# Altium PCB amc3302-v1.02.PcbDoc (part 1 of 2)
Units mm, origin at the board's own origin, x right, y up, seen from the top; angles counter-clockwise.
Board outline 100 x 75 mm, 4 copper layers (Top Layer, GND, VCC, Bottom Layer), stack 1.592 mm thick; 98 components, 51 nets, 268 pads, 520 vias.
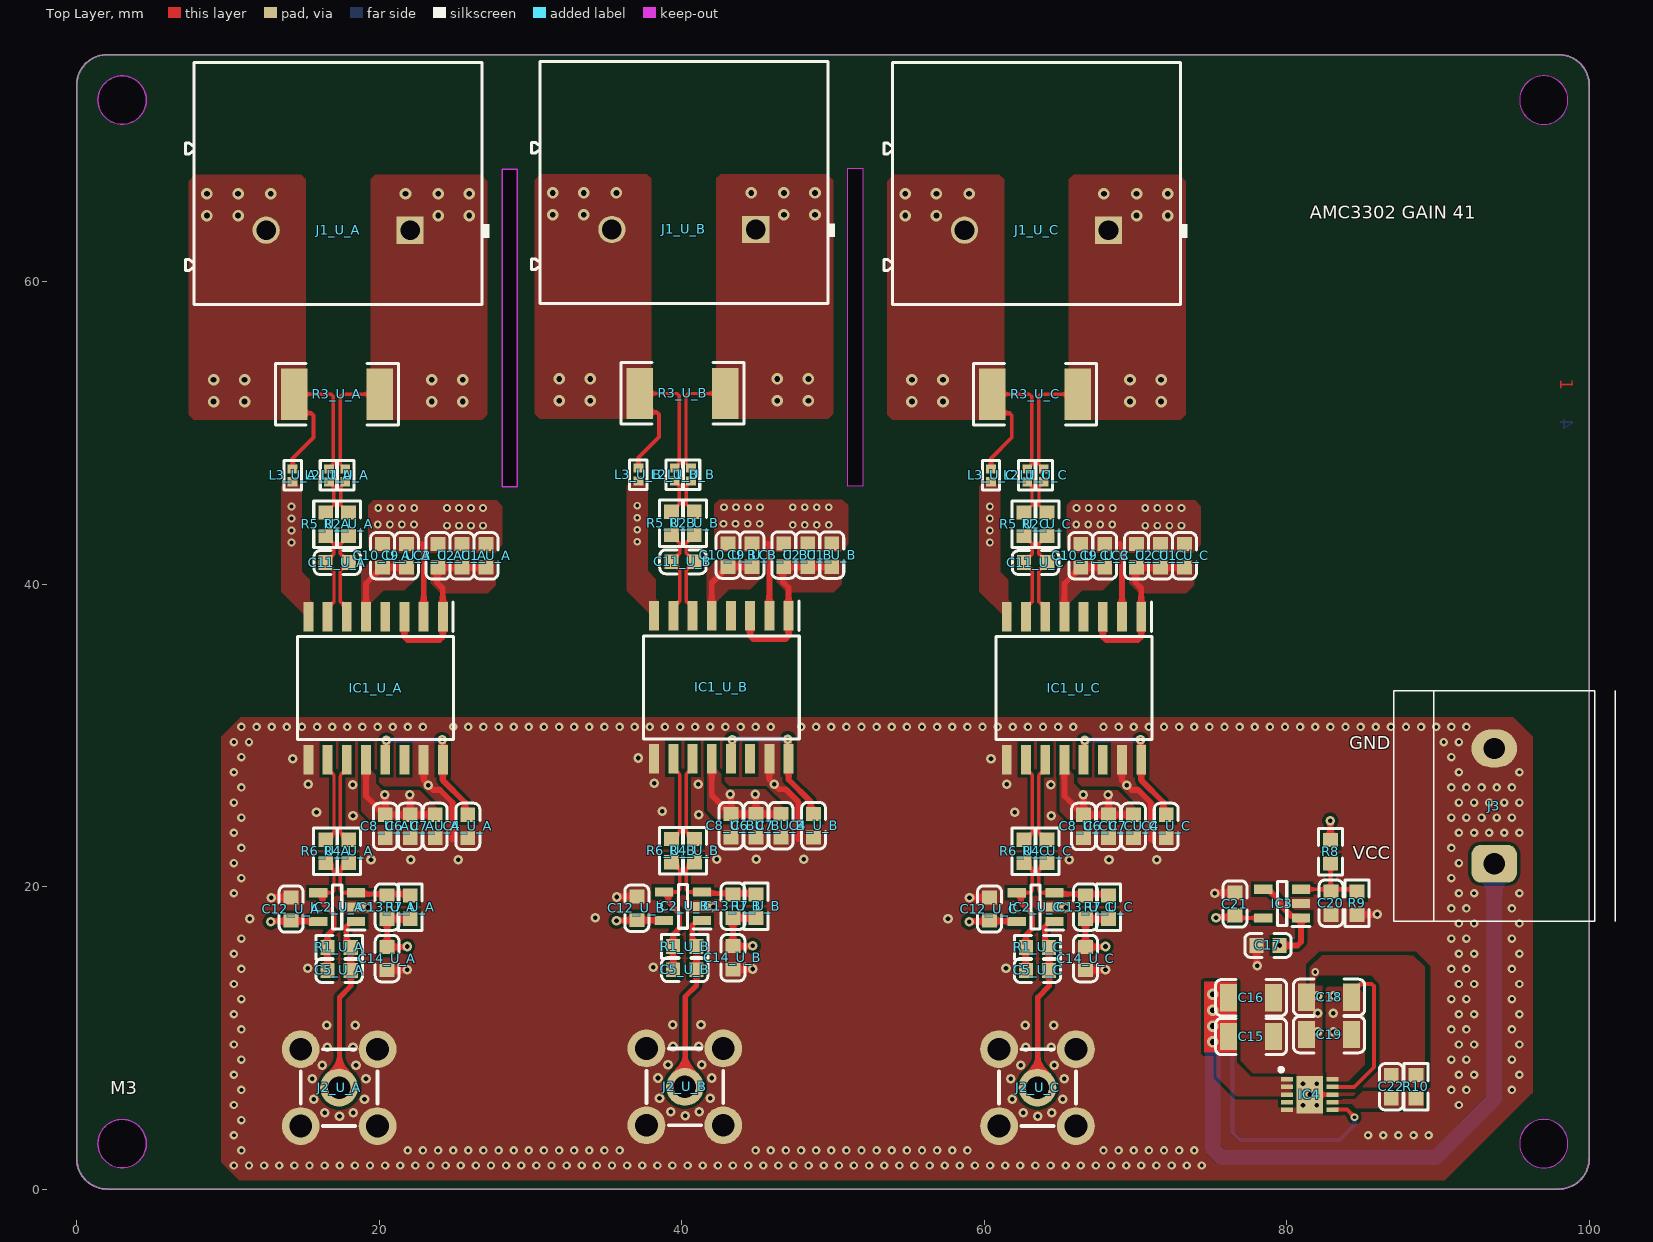
[diagram p0: Top Layer view]
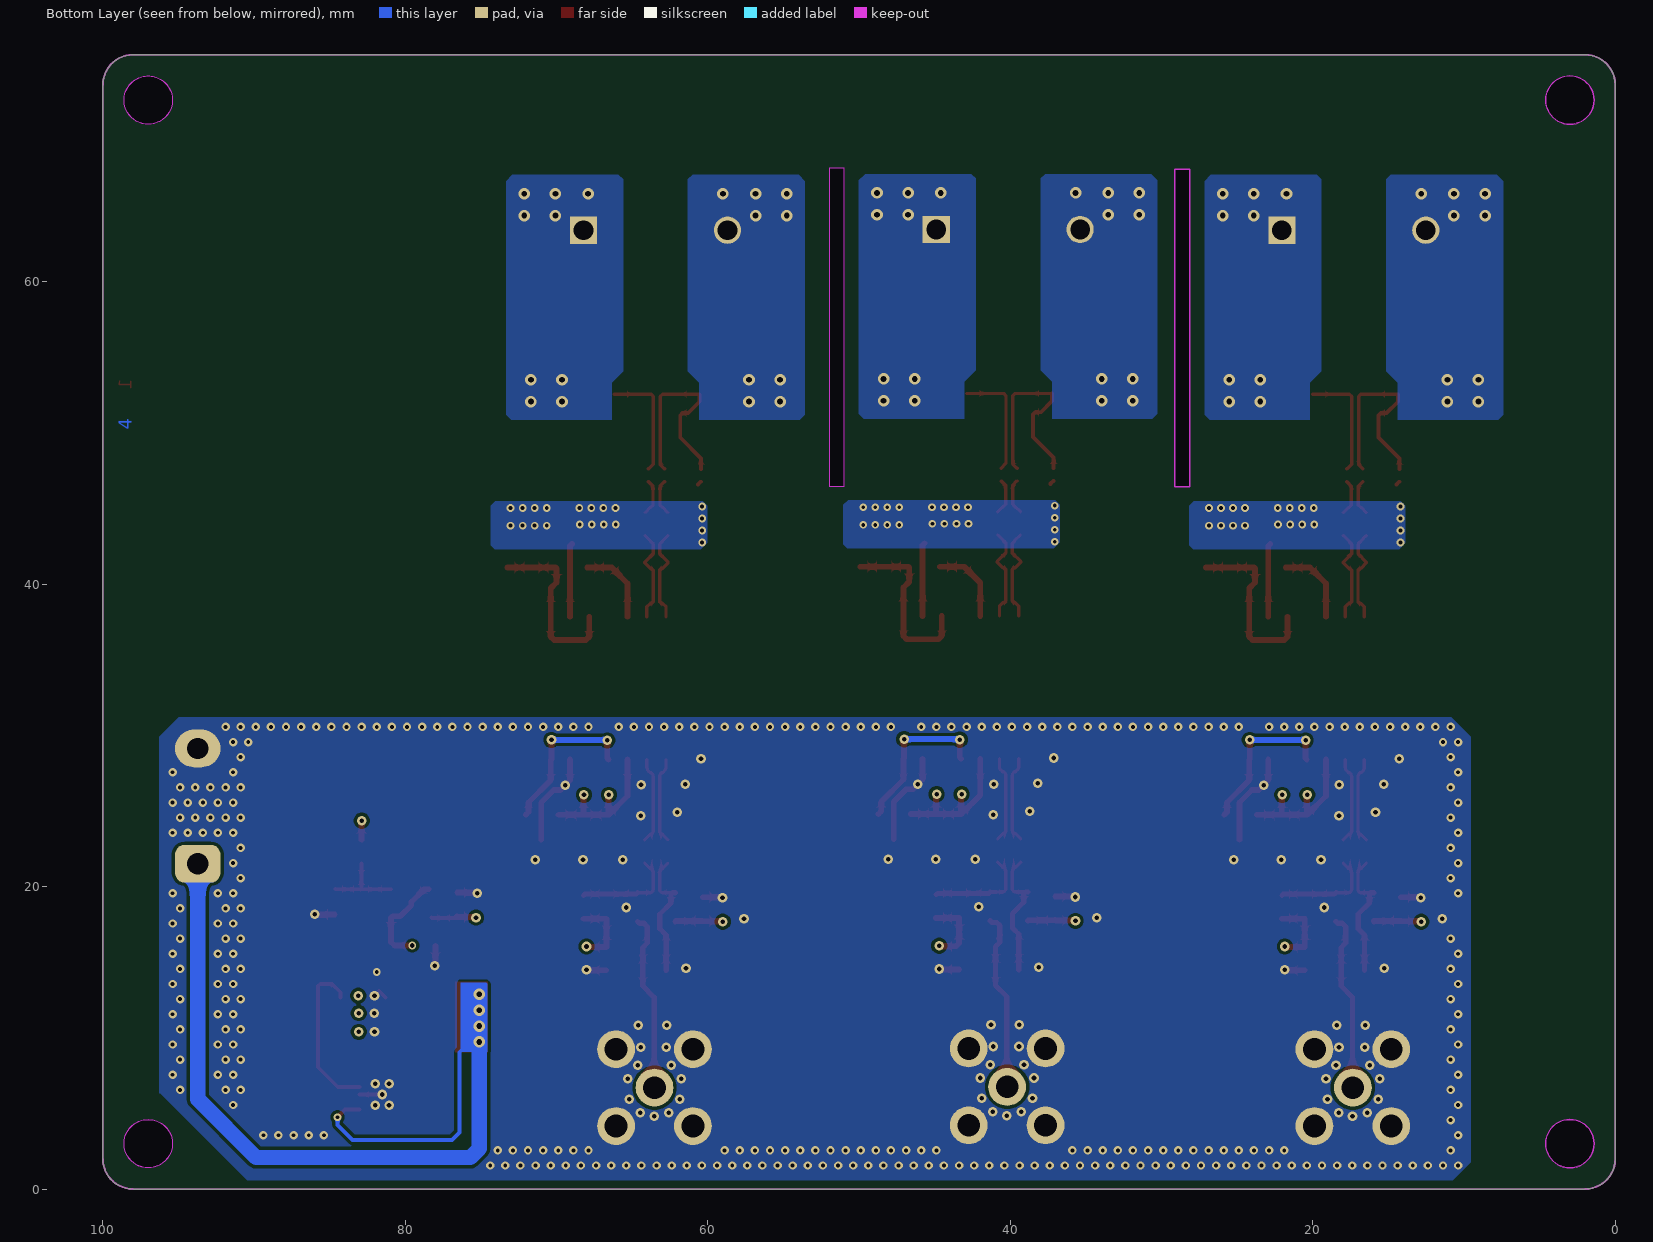
[diagram p1: Bottom Layer view, seen from below]
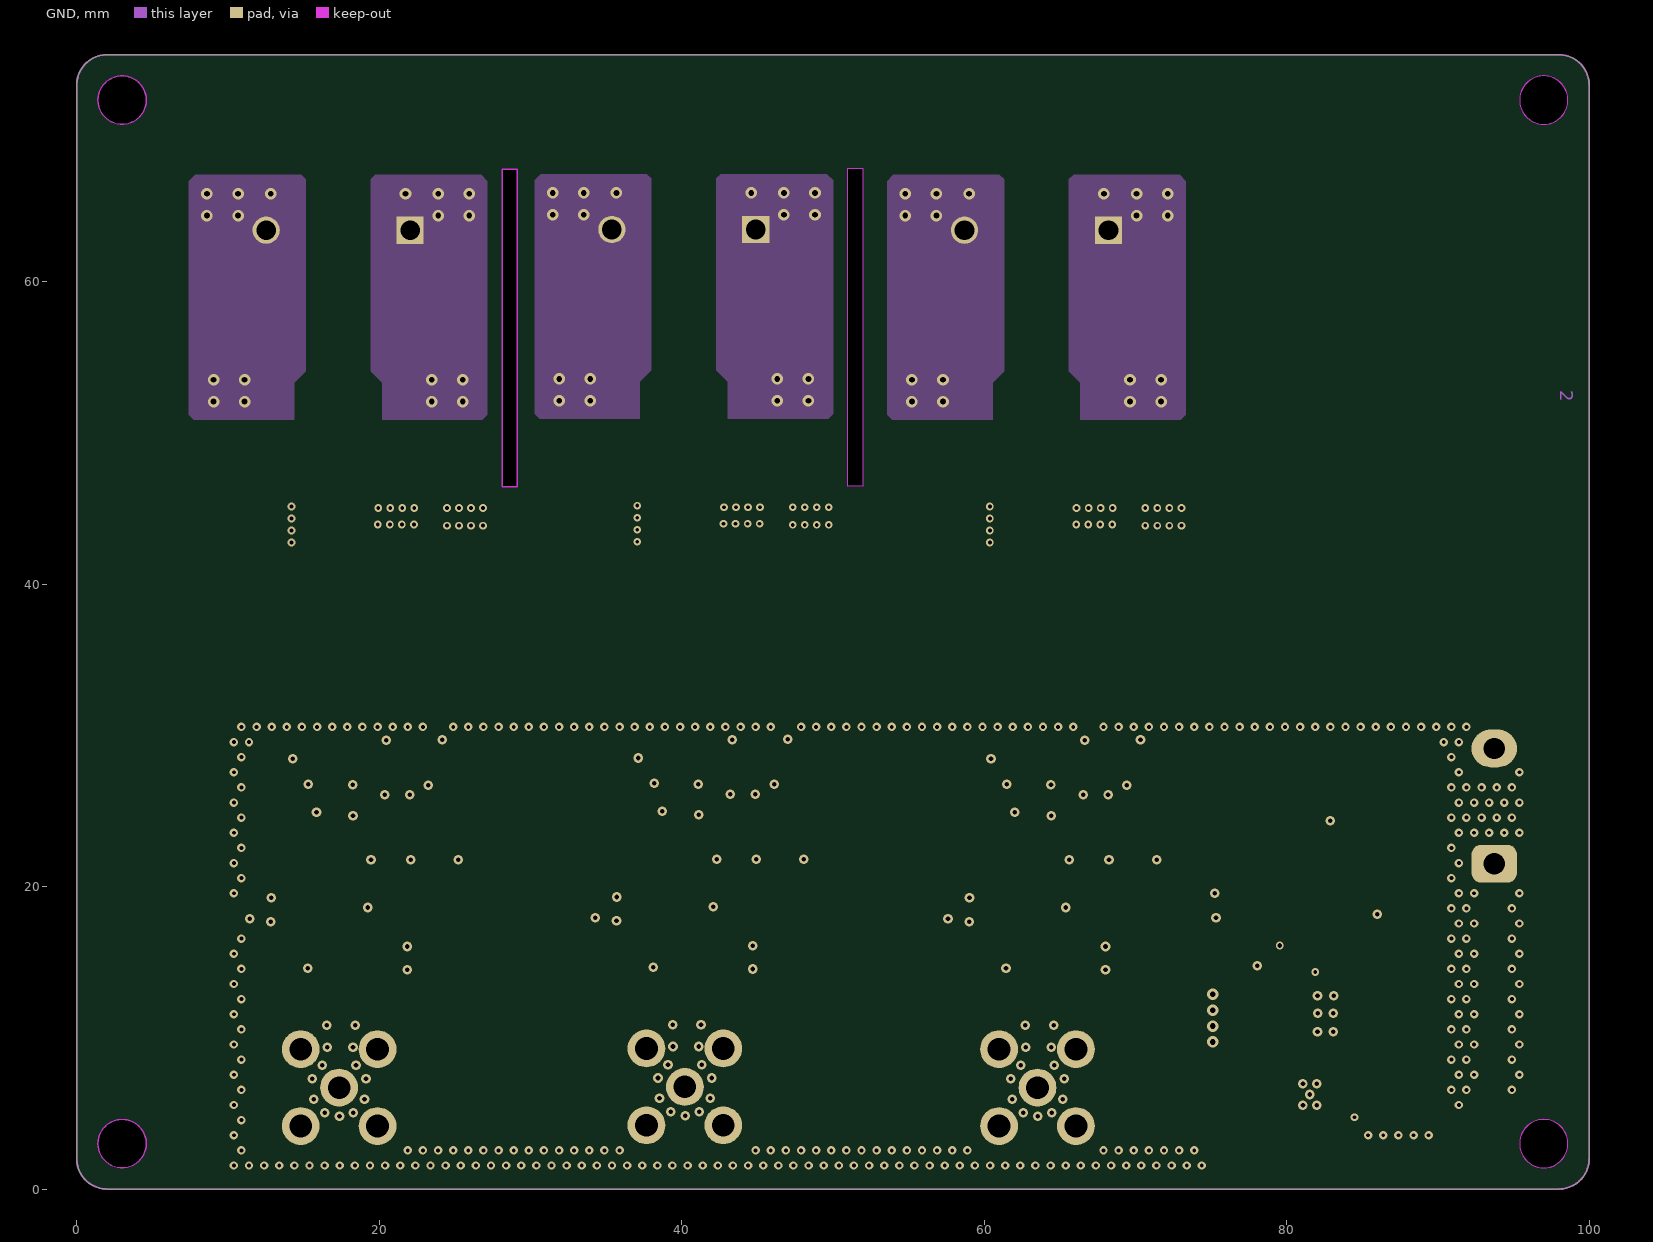
[diagram p2: GND]
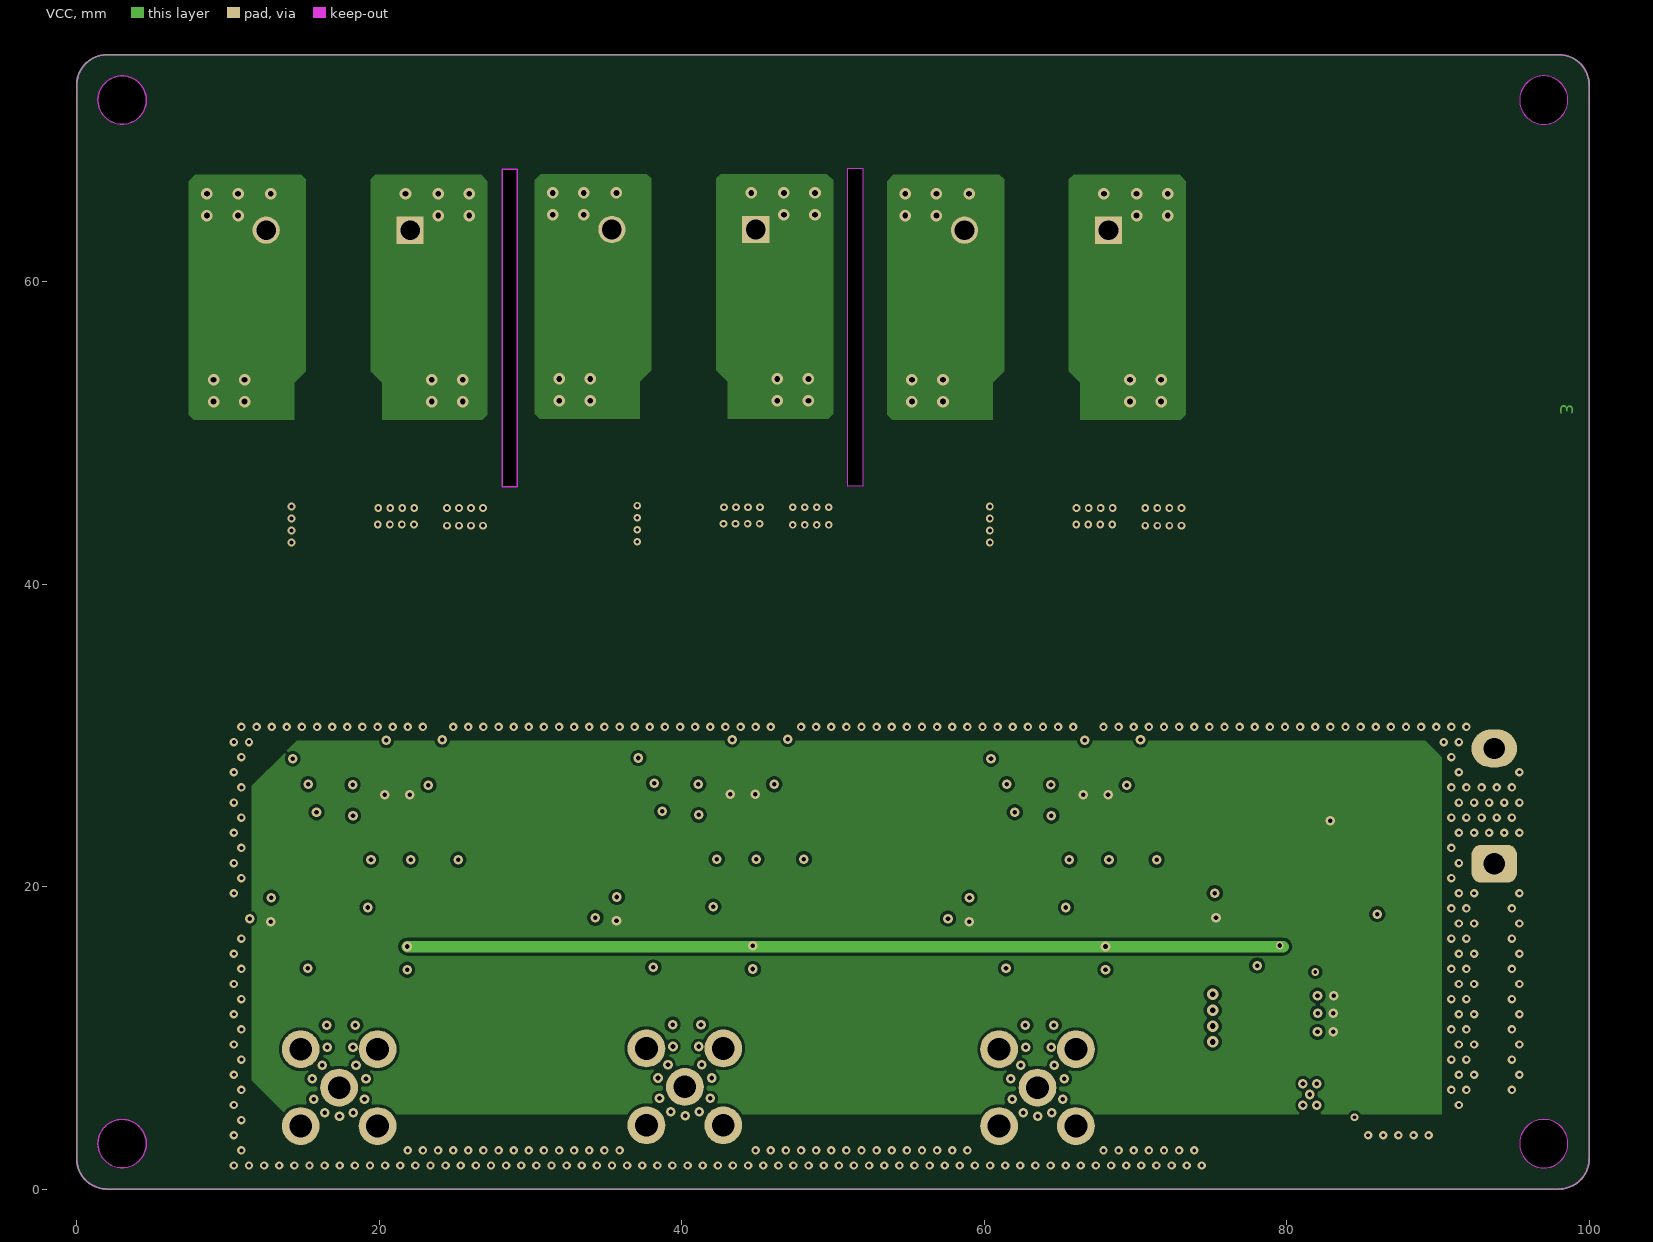
[diagram p3: VCC]
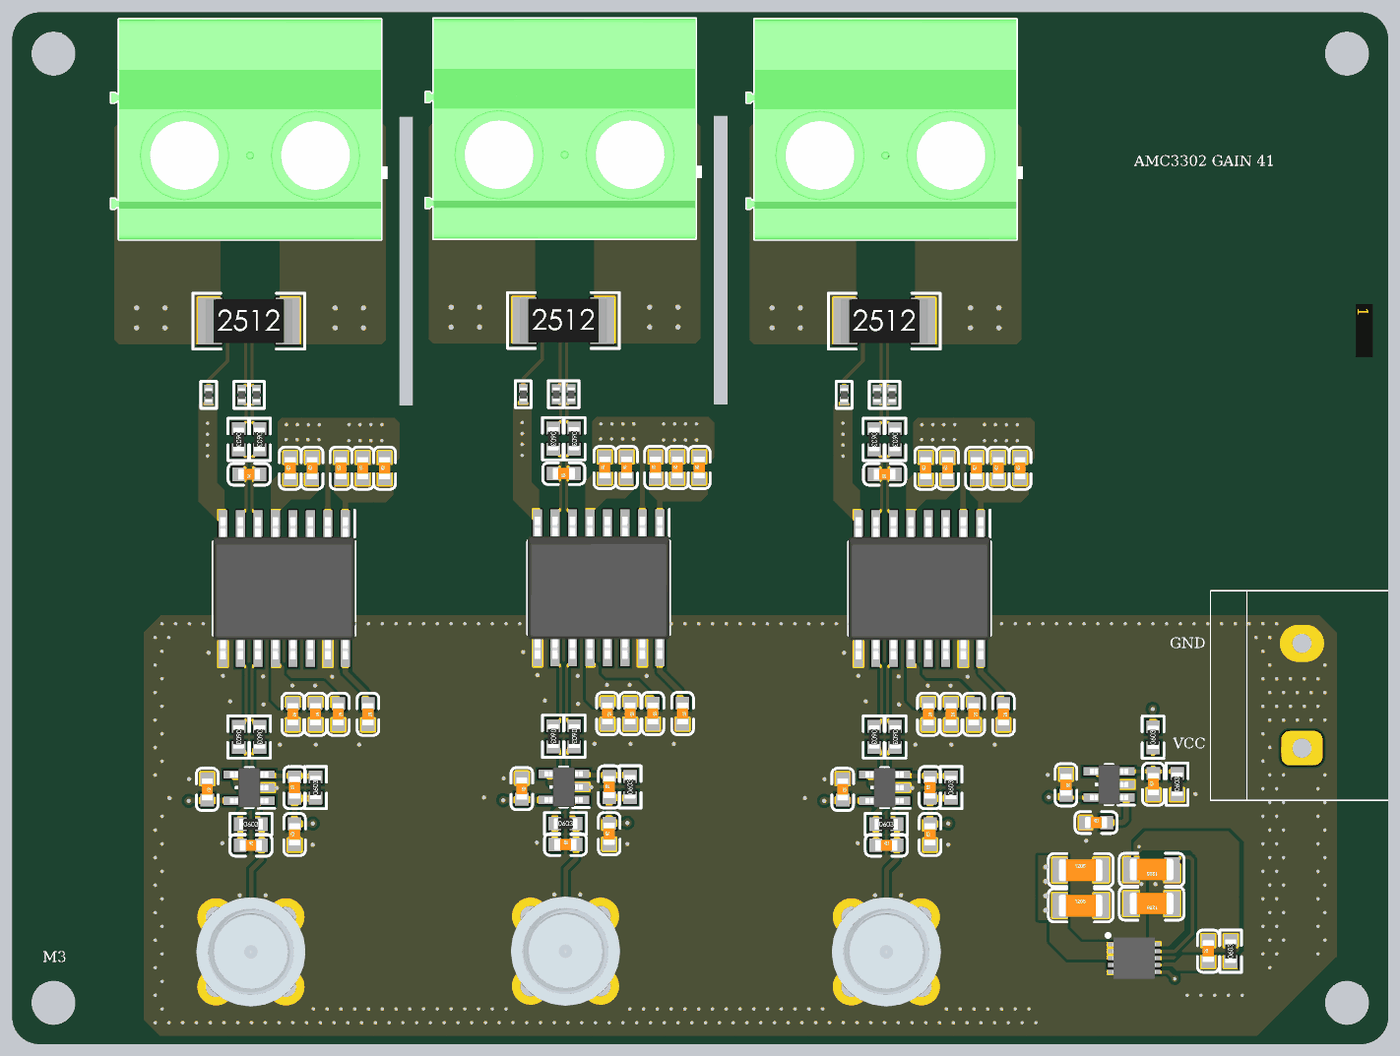
[diagram p5: 3D render of the assembled board from above, using the file's embedded part models]

## Layer stack, top to bottom
Top Solder: solder mask 0.0102, Solder Resist, Dk 3.5
Top Layer: signal copper 0.0356
Dielectric 2: prepreg 0.2103, PP-006, Dk 4.1
GND: signal copper 0.0175
Dielectric 1: dielectric 1.065, FR-4, Dk 4.8
VCC: signal copper 0.0175
Dielectric 3: prepreg 0.2103, PP-006, Dk 4.1
Bottom Layer: signal copper 0.0356
Bottom Solder: solder mask 0.0102, Solder Resist, Dk 3.5

## Board outline
0,2 0,73 cw(c2,73) 2,75 98,75 cw(c98,73) 100,73 100,2 cw(c98,2) 98,0 2,0 cw(c2,2)
cut-out: 95.4,72 ccw(c97,72) 97,70.4 ccw(c97,72) 98.6,72 ccw(c97,72) 97,73.6 ccw(c97,72)
cut-out: 95.4,3 ccw(c97,3) 97,1.4 ccw(c97,3) 98.6,3 ccw(c97,3) 97,4.6 ccw(c97,3)
cut-out: 3,70.4 cw(c3,72) 1.4,72 cw(c3,72) 3,73.6 cw(c3,72) 4.6,72 cw(c3,72)
cut-out: 3,1.4 cw(c3,3) 1.4,3 cw(c3,3) 3,4.6 cw(c3,3) 4.6,3 cw(c3,3)
cut-out: 50.978,46.482 50.978,67.488 51.978,67.488 51.978,46.482
cut-out: 28.118,46.431 28.118,67.437 29.118,67.437 29.118,46.431

## Design rules (kind name [scope] priority, off if disabled: settings)
Clearance [All] p1: gap=0.203 ignorepadtopadclearanceinfootprint=TRUE
DiffPairsRouting [All] p1: maxlimit=0.254 minlimit=0.203 mostfreqgap=0.203 toplayer_minwidth=0.152 toplayer_maxwidth=0.381 toplayer_prefwidth=0.22 midlayer1_minwidth=0.152 midlayer1_maxwidth=0.381 midlayer1_prefwidth=0.22 midlayer2_minwidth=0.152 midlayer2_maxwidth=0.381 midlayer2_prefwidth=0.22 bottomlayer_minwidth=0.152 bottomlayer_maxwidth=0.381 bottomlayer_prefwidth=0.22 maxuncoupledlength=12.7
HoleToHoleClearance [All] p1: gap=0 allowstackedmicrovias=TRUE
MinimumSolderMaskSliver [All] p1: minsoldermaskwidth=0
PlaneConnect [All] p1: planeconnectstyle=Direct reliefexpansion=0.508 reliefentries=4 reliefconductorwidth=0.254 reliefairgap=0.254
PolygonConnect [All] p1: connectstyle=Direct reliefconductorwidth=0.254 reliefentries=4 polygonreliefangle="90 Angle" airgapwidth=0.254
RoutingVias [All] p1: holewidth=0.356 width=0.711 viastyle="Through Hole" minholewidth=0.152 minwidth=0.508 maxholewidth=1.27 maxwidth=1.27
SilkToSilkClearance [All] p1: silktosilkclearance=0
SilkToSolderMaskClearance [IsPad] p1: minsilkscreentomaskgap=0 clearancetoexposedcopper=TRUE
SolderMaskExpansion [All] p1: expansion=0.102 istentingtop=FALSE
SupplyNets "Schematic Supply Nets_5" [InNet('Vref')] p1: voltage=0.000
SupplyNets "Schematic Supply Nets_3" [InNet('+3V3')] p2: voltage=0.000
SupplyNets "Schematic Supply Nets_1" [InNet('GND')] p3: voltage=0.000
SupplyNets "Schematic Supply Nets" [InNet('Vin')] p4: voltage=0.000
Width [All] p1: maxlimit=1.27 minlimit=0.254 preferedwidth=0.349
24 further rules are at their usual default settings.

## Classes and differential pairs
channel class Sheet2: U_A U_B U_C
component class U_C: C1_U_C C2_U_C C3_U_C C4_U_C C5_U_C C6_U_C C7_U_C C8_U_C C9_U_C C10_U_C C11_U_C C12_U_C C13_U_C C14_U_C IC1_U_C IC2_U_C J1_U_C J2_U_C L1_U_C L2_U_C L3_U_C R1_U_C R2_U_C R3_U_C R4_U_C R5_U_C R6_U_C R7_U_C
component class U_B: C1_U_B C2_U_B C3_U_B C4_U_B C5_U_B C6_U_B C7_U_B C8_U_B C9_U_B C10_U_B C11_U_B C12_U_B C13_U_B C14_U_B IC1_U_B IC2_U_B J1_U_B J2_U_B L1_U_B L2_U_B L3_U_B R1_U_B R2_U_B R3_U_B R4_U_B R5_U_B R6_U_B R7_U_B
component class U_A: C1_U_A C2_U_A C3_U_A C4_U_A C5_U_A C6_U_A C7_U_A C8_U_A C9_U_A C10_U_A C11_U_A C12_U_A C13_U_A C14_U_A IC1_U_A IC2_U_A J1_U_A J2_U_A L1_U_A L2_U_A L3_U_A R1_U_A R2_U_A R3_U_A R4_U_A R5_U_A R6_U_A R7_U_A
component class Sheet3: C15 C16 C18 C22 IC3 IC4 J3 R8 R9 R10
differential pair op_U_C: +op_U_C_P -op_U_C_N
differential pair op_U_B: +op_U_B_P -op_U_B_N
differential pair op_U_A: +op_U_A_P -op_U_A_N
differential pair _U_C: +_U_C_P -_U_C_N
differential pair _U_B: +_U_B_P -_U_B_N
differential pair _U_A: +_U_A_P -_U_A_N
differential pair Out_U_C: +Out_U_C_P -Out_U_C_N
differential pair Out_U_B: +Out_U_B_P -Out_U_B_N
differential pair Out_U_A: +Out_U_A_P -Out_U_A_N
differential pair In_U_C: +In_U_C_P -In_U_C_N
differential pair In_U_B: +In_U_B_P -In_U_B_N
differential pair In_U_A: +In_U_A_P -In_U_A_N
differential pair In_ic_U_C: +In_ic_U_C_P -In_ic_U_C_N
differential pair In_ic_U_B: +In_ic_U_B_P -In_ic_U_B_N
differential pair In_ic_U_A: +In_ic_U_A_P -In_ic_U_A_N

## Components (designator, comment, footprint, x,y, rotation, side; value= is the part's Value field where it differs from the comment)
C1_U_A "1nF" C-0603 27.063,41.867 r90 top (schematic designator C1)
C1_U_B "1nF" C-0603 49.923,41.918 r90 top (schematic designator C1)
C1_U_C "1nF" C-0603 73.241,41.867 r90 top (schematic designator C1)
C2_U_A "0.1uF" C-0603 25.476,41.867 r90 top (schematic designator C2)
C2_U_B "0.1uF" C-0603 48.336,41.918 r90 top (schematic designator C2)
C2_U_C "0.1uF" C-0603 71.653,41.867 r90 top (schematic designator C2)
C3_U_A "1uF" C-0603 23.889,41.867 r90 top (schematic designator C3)
C3_U_B "1uF" C-0603 46.749,41.918 r90 top (schematic designator C3)
C3_U_C "1uF" C-0603 70.066,41.867 r90 top (schematic designator C3)
C4_U_A "0.1uF" C-0603 25.857,23.978 r270 top (schematic designator C4)
C4_U_B "0.1uF" C-0603 48.717,24.028 r270 top (schematic designator C4)
C4_U_C "0.1uF" C-0603 72.034,23.978 r270 top (schematic designator C4)
C5_U_A "330pF" C-0603 17.348,14.453 r0 top (schematic designator C5)
C5_U_B "330pF" C-0603 40.208,14.503 r0 top (schematic designator C5)
C5_U_C "330pF" C-0603 63.525,14.453 r0 top (schematic designator C5)
C6_U_A "1nF" C-0603 22.047,23.978 r270 top (schematic designator C6)
C6_U_B "1nF" C-0603 44.907,24.028 r270 top (schematic designator C6)
C6_U_C "1nF" C-0603 68.224,23.978 r270 top (schematic designator C6)
C7_U_A "1uF" C-0603 23.698,23.978 r270 top (schematic designator C7)
C7_U_B "1uF" C-0603 46.558,24.028 r270 top (schematic designator C7)
C7_U_C "1uF" C-0603 69.875,23.978 r270 top (schematic designator C7)
C8_U_A "10uF" C-0603 20.396,23.978 r270 top (schematic designator C8)
C8_U_B "10uF" C-0603 43.256,24.028 r270 top (schematic designator C8)
C8_U_C "10uF" C-0603 66.573,23.978 r270 top (schematic designator C8)
C9_U_A "0.1uF" C-0603 21.794,41.867 r90 top (schematic designator C9)
C9_U_B "0.1uF" C-0603 44.654,41.918 r90 top (schematic designator C9)
C9_U_C "0.1uF" C-0603 67.971,41.867 r90 top (schematic designator C9)
C10_U_A "1nF" C-0603 20.206,41.867 r90 top (schematic designator C10)
C10_U_B "1nF" C-0603 43.066,41.918 r90 top (schematic designator C10)
C10_U_C "1nF" C-0603 66.384,41.867 r90 top (schematic designator C10)
C11_U_A "10nF" C-0603 17.221,41.421 r180 top (schematic designator C11)
C11_U_B "10nF" C-0603 40.081,41.471 r180 top (schematic designator C11)
C11_U_C "10nF" C-0603 63.398,41.421 r180 top (schematic designator C11)
C12_U_A "0.1uF" C-0603 14.173,18.517 r270 top (schematic designator C12)
C12_U_B "0.1uF" C-0603 37.033,18.567 r270 top (schematic designator C12)
C12_U_C "0.1uF" C-0603 60.35,18.517 r270 top (schematic designator C12)
C13_U_A "330pF" C-0603 20.523,18.644 r90 top (schematic designator C13)
C13_U_B "330pF" C-0603 43.383,18.694 r90 top (schematic designator C13)
C13_U_C "330pF" C-0603 66.7,18.644 r90 top (schematic designator C13)
C14_U_A "0.1uF" C-0603 20.523,15.24 r90 top (schematic designator C14)
C14_U_B "0.1uF" C-0603 43.383,15.291 r90 top (schematic designator C14)
C14_U_C "0.1uF" C-0603 66.7,15.24 r90 top (schematic designator C14)
C15 "10uF 50V" C-1206 77.648,10.084 r0 top
C16 "2.2uF 50V" C-1206 77.648,12.649 r0 top
C17 "0.1uF" C-0603 78.765,16.104 r0 top
C18 "10uF 50V" C-1206 82.804,12.675 r180 top
C19 "10uF 50V" C-1206 82.804,10.211 r180 top
C20 "0.1uF" C-0603 82.931,18.898 r90 top
C21 "0.1uF" C-0603 76.581,18.847 r270 top
C22 "4.7uF 50V" C-0603 86.919,6.756 r90 top
IC1_U_A "AMC3302DWE" SOIC127P1030X265-16N 19.761,33.122 r270 top (schematic designator IC1)
IC1_U_B "AMC3302DWE" SOIC127P1030X265-16N 42.621,33.172 r270 top (schematic designator IC1)
IC1_U_C "AMC3302DWE" SOIC127P1030X265-16N 65.938,33.122 r270 top (schematic designator IC1)
IC2_U_A "opa991qbvrq1" SOT95P280X145-5N 17.221,18.644 r180 top (schematic designator IC2)
IC2_U_B "opa991qbvrq1" SOT95P280X145-5N 40.081,18.694 r180 top (schematic designator IC2)
IC2_U_C "opa991qbvrq1" SOT95P280X145-5N 63.398,18.644 r180 top (schematic designator IC2)
IC3 "opa991qbvrq1" SOT95P280X145-5N 79.705,18.872 r180 top
IC4 "LT3045EDD#PBF" SON50P300X300X80-11N-D 81.534,6.248 r0 top
J1_U_A "J-2PIN" 2pin 16.84,63.398 r0 top (schematic designator J1)
J1_U_B "J-2PIN" 2pin 39.7,63.449 r0 top (schematic designator J1)
J1_U_C "J-2PIN" 2pin 63.017,63.398 r0 top (schematic designator J1)
J2_U_A "J-2PIN" "SMA RF同轴链接器" 17.348,6.706 r0 top (schematic designator J2)
J2_U_B "J-2PIN" "SMA RF同轴链接器" 40.208,6.756 r0 top (schematic designator J2)
J2_U_C "J-2PIN" "SMA RF同轴链接器" 63.525,6.706 r0 top (schematic designator J2)
J3 "J-2PIN" "CON  7.62mm 2x1P" 93.726,25.324 r90 top
L1_U_A "FB" L-0402 17.758,47.193 r270 top (schematic designator L1)
L1_U_B "FB" L-0402 40.618,47.244 r270 top (schematic designator L1)
L1_U_C "FB" L-0402 63.935,47.193 r270 top (schematic designator L1)
L2_U_A "FB" L-0402 16.675,47.193 r270 top (schematic designator L2)
L2_U_B "FB" L-0402 39.535,47.244 r270 top (schematic designator L2)
L2_U_C "FB" L-0402 62.853,47.193 r270 top (schematic designator L2)
L3_U_A "FB" L-0402 14.275,47.193 r270 top (schematic designator L3)
L3_U_B "FB" L-0402 37.135,47.244 r270 top (schematic designator L3)
L3_U_C "FB" L-0402 60.452,47.193 r270 top (schematic designator L3)
R1_U_A "3.3k" R-0603 17.348,15.977 r0 top (schematic designator R1)
R1_U_B "3.3k" R-0603 40.208,16.027 r0 top (schematic designator R1)
R1_U_C "3.3k" R-0603 63.525,15.977 r0 top (schematic designator R1)
R2_U_A "10R" R-0603 17.973,43.961 r270 top (schematic designator R2)
R2_U_B "10R" R-0603 40.833,44.011 r270 top (schematic designator R2)
R2_U_C "10R" R-0603 64.151,43.961 r270 top (schematic designator R2)
R3_U_A "R" R-2512 17.196,52.554 r0 top (schematic designator R3)
R3_U_B "R" R-2512 40.056,52.605 r0 top (schematic designator R3)
R3_U_C "R" R-2512 63.373,52.554 r0 top (schematic designator R3)
R4_U_A "3.3k" R-0603 17.983,22.327 r270 top (schematic designator R4)
R4_U_B "3.3k" R-0603 40.843,22.377 r270 top (schematic designator R4)
R4_U_C "3.3k" R-0603 64.16,22.327 r270 top (schematic designator R4)
R5_U_A "10R" R-0603 16.46,43.961 r270 top (schematic designator R5)
R5_U_B "10R" R-0603 39.32,44.011 r270 top (schematic designator R5)
R5_U_C "10R" R-0603 62.637,43.961 r270 top (schematic designator R5)
R6_U_A "3.3k" R-0603 16.459,22.327 r270 top (schematic designator R6)
R6_U_B "3.3k" R-0603 39.319,22.377 r270 top (schematic designator R6)
R6_U_C "3.3k" R-0603 62.636,22.327 r270 top (schematic designator R6)
R7_U_A "3.3k" R-0603 22.047,18.644 r90 top (schematic designator R7)
R7_U_B "3.3k" R-0603 44.907,18.694 r90 top (schematic designator R7)
R7_U_C "3.3k" R-0603 68.224,18.644 r90 top (schematic designator R7)
R8 "3.3k" R-0603 82.906,22.301 r90 top
R9 "3.3k" R-0603 84.658,18.898 r90 top
R10 "33.2K" R-0603 88.544,6.756 r90 top

## Footprints (in the part's own frame and the unit in brackets; to place one, negate y for a bottom-side part, rotate by r counter-clockwise, add the part's x,y. Pads: shape width x height; smd on the part's side, far side on the other; paste and mask are expansions set on the pad)
2pin [mm]
  rect 1.8x1.8 hole 1.3: 1(5.202,0)
  round 1.8 hole 1.3: 2(-4.318,0)
  silkscreen extent -9.65,-4.9 10.44,11.1, body extent -9.65,-4.9 9.96,11.1, height 22
C-0603 [mm]
  rect 0.93x0.98 smd: 1(-0.77,0) 2(0.77,0)
  silkscreen extent -1.53,-0.79 1.54,0.79, body extent -0.8,-0.4 0.8,0.4, height 0.3
C-1206 [mm]
  rect 1.13x1.8 smd: 1(-1.49,0) 2(1.49,0)
  silkscreen extent -2.36,-1.2 2.35,1.2, body extent -1.6,-0.81 1.6,0.79, height 1
"CON  7.62mm 2x1P" [mm]
  rrect50% 2.5x3 hole 1.4: 1(-3.81,0)
  oval 2.5x3 hole 1.4: 2(3.81,0)
  silkscreen extent -7.62,-8 7.62,6.65
L-0402 [mm]
  rect 0.6x0.65 smd mask+0.051: 1(-0.425,0) 2(0.425,0)
  silkscreen extent -0.97,-0.58 0.97,0.58, body extent -0.51,-0.26 0.54,0.26, height 0.36
R-0603 [mm]
  rect 0.93x0.98 smd: 1(-0.77,0) 2(0.77,0)
  silkscreen extent -1.53,-0.79 1.54,0.79, body extent -0.85,-0.4 0.85,0.4, height 0.56
R-2512 [mm]
  rect 1.75x3.4 smd: 1(-2.825,0) 2(2.825,0)
  silkscreen extent -4.06,-2.03 4.06,2.03, body extent -3.16,-1.6 3.16,1.6, height 0.62
"SMA RF同轴链接器" [mm]
  round 2.5 hole 1.5: 1(0,0) 2(-2.54,-2.54) 2(-2.54,2.54) 2(2.54,-2.54) 2(2.54,2.54)
  silkscreen extent -2.54,-2.54 2.54,2.54, body extent -3.96,-3.96 3.96,3.96, height 9.5
SOIC127P1030X265-16N [mm]
  rect 1.95x0.65 smd: 1(-4.725,4.445) 2(-4.725,3.175) 3(-4.725,1.905) 4(-4.725,0.635) 5(-4.725,-0.635) 6(-4.725,-1.905) 7(-4.725,-3.175) 8(-4.725,-4.445) 9(4.725,-4.445) 10(4.725,-3.175) 11(4.725,-1.905) 12(4.725,-0.635) 13(4.725,0.635) 14(4.725,1.905) 15(4.725,3.175) 16(4.725,4.445)
  silkscreen extent -5.7,-5.15 3.4,5.15, body extent -5.17,-5.15 5.17,5.15, height 2.59
SON50P300X300X80-11N-D [mm]
  rect 0.8x0.3 smd: 1(-1.5,1) 2(-1.5,0.5) 3(-1.5,0) 4(-1.5,-0.5) 5(-1.5,-1) 6(1.5,-1) 7(1.5,-0.5) 8(1.5,0) 9(1.5,0.5) 10(1.5,1)
  rect 1.75x2.48 smd: 11(0,0)
  silkscreen extent -2.02,1.53 -1.77,1.77, body extent -1.55,-1.5 1.55,1.5, height 0.8
SOT95P280X145-5N [mm]
  rect 1.2x0.6 smd: 1(-1.25,0.95) 2(-1.25,0) 3(-1.25,-0.95) 4(1.25,-0.95) 5(1.25,0.95)
  silkscreen extent -1.85,-1.45 0.3,1.5, body extent -1.4,-1.45 1.4,1.45, height 1.2

## Part data
C1_U_A C1_U_B C1_U_C C2_U_A C2_U_B C2_U_C C3_U_A C3_U_B C3_U_C C4_U_A C4_U_B C4_U_C C5_U_A C5_U_B C5_U_C C6_U_A C6_U_B C6_U_C C7_U_A C7_U_B C7_U_C C8_U_A C8_U_B C8_U_C C9_U_A C9_U_B C9_U_C C10_U_A C10_U_B C10_U_C C11_U_A C11_U_B C11_U_C C12_U_A C12_U_B C12_U_C C13_U_A C13_U_B C13_U_C C14_U_A C14_U_B C14_U_C C15 C16 C17 C18 C19 C20 C21 C22: library part C, "Non Polarised"
IC1_U_A IC1_U_B IC1_U_C: "Integrated Circuit", Manufacturer_Name="Texas Instruments", Mouser Part Number=595-AMC3302DWE, Arrow Part Number=AMC3302DWE, Arrow Price/Stock=https://www.arrow.com/en/products/amc3302dwe/texas-instruments?region=nac, Datasheet Link=https://www.ti.com/lit/ds/symlink/amc3302.pdf?ts=1643366130509, Height=2.65mm, Manufacturer_Part_Number=AMC3302DWE, Mouser Price/Stock=https://www.mouser.co.uk/ProductDetail/Texas-Instruments/AMC3302DWE?qs=DRkmTr78QAT3OfY8Rd%252BeWA%3D%3D
IC2_U_A IC2_U_B IC2_U_C IC3: library part TLV9001IDBVR, "Integrated Circuit", Manufacturer_Name="Texas Instruments", Mouser Part Number=595-TLV9001IDBVR, Arrow Part Number=TLV9001IDBVR, Arrow Price/Stock=https://www.arrow.com/en/products/tlv9001idbvr/texas-instruments?region=europe, Datasheet Link=http://www.ti.com/lit/gpn/tlv9001, Height=1.45mm, Manufacturer_Part_Number=TLV9001IDBVR, Mouser Price/Stock=https://www.mouser.co.uk/ProductDetail/Texas-Instruments/TLV9001IDBVR?qs=gTYE2QTfZfR6dUkET6Yj7w%3D%3D
IC4: "Integrated Circuit", Manufacturer_Name="Analog Devices", Mouser Part Number=584-LT3045EDD#PBF, Arrow Part Number=LT3045EDD#PBF, Arrow Price/Stock=https://www.arrow.com/en/products/lt3045eddpbf/analog-devices?utm_currency=USD&region=europe, Datasheet Link=https://www.analog.com/LT3045/datasheet, Height=0.8mm, Manufacturer_Part_Number=LT3045EDD#PBF, Mouser Price/Stock=https://www.mouser.co.uk/ProductDetail/Analog-Devices/LT3045EDDPBF?qs=oahfZPh6IAItEW%2FaDCA8LQ%3D%3D
L1_U_A L1_U_B L1_U_C L2_U_A L2_U_B L2_U_C L3_U_A L3_U_B L3_U_C: library part L-SMD, "1.8k@100Mhz"
R1_U_A R1_U_B R1_U_C R2_U_A R2_U_B R2_U_C R4_U_A R4_U_B R4_U_C R5_U_A R5_U_B R5_U_C R6_U_A R6_U_B R6_U_C R7_U_A R7_U_B R7_U_C R8 R9 R10: library part R, "Resistor"
R3_U_A R3_U_B R3_U_C: "Resistor"

## Via types
v1: diameter 0.559, hole 0.254, Top Layer to Bottom Layer, tented both sides, 284 vias
v2: diameter 0.635, hole 0.305, Top Layer to Bottom Layer, tented both sides, 115 vias
v3: diameter 0.508, hole 0.254, Top Layer to Bottom Layer, tented both sides, 62 vias
v4: diameter 0.762, hole 0.381, Top Layer to Bottom Layer, tented both sides, 58 vias
v5: diameter 0.508, hole 0.305, Top Layer to Bottom Layer, tented both sides, 1 vias

## Nets (pads, with @x,y where several pads share a name; then routed paths per layer and width w, separated by ;. In a path a pad name is that pad's centre, name@x,y a point inside that pad or via, vN(x,y) a via of type N, cw(c..) or ccw(c..) an arc to the next point about the centre after c; other vN are vias at no path point)
+3V3: C6_U_A.1 C6_U_B.1 C6_U_C.1 C7_U_A.1 C7_U_B.1 C7_U_C.1 C8_U_A.1 C8_U_B.1 C8_U_C.1 C12_U_A.2 C12_U_B.2 C12_U_C.2 C18.1 C19.1 C21.2 IC1_U_A.12 IC1_U_B.12 IC1_U_C.12 IC2_U_A.5 IC2_U_B.5 IC2_U_C.5 IC3.5 IC4.9 IC4.10 R8.2 | length 54.7
  Top Layer w0.254: C21.2@76.581,18.077 76.736,17.922 78.247,17.922 IC3.5@78.283,17.958 ; IC4.9@83.034,6.748 84.472,6.748 85.776,8.052 85.776,13.415 85.627,13.564 84.848,13.564 84.294,13.01 C18.1@84.294,12.675
  Top Layer w0.381: v2@12.852,17.729 12.869,17.712 14.139,17.712 C12_U_A.2@14.173,17.747 14.2,17.72 15.945,17.72 IC2_U_A.5@15.971,17.694 ; IC1_U_A.12@19.126,28.397 19.126,25.993 20.371,24.748 C8_U_A.1@20.396,24.748 ; v2@20.396,26.018 C8_U_A.1@20.396,24.748 ; v2@22.047,26.018 C6_U_A.1@22.047,24.748 ; C7_U_A.1@23.698,24.748 C6_U_A.1@22.047,24.748 ; v2@35.712,17.78 35.729,17.763 36.999,17.763 C12_U_B.2@37.033,17.797 37.06,17.771 38.805,17.771 IC2_U_B.5@38.831,17.744 ; IC1_U_B.12@41.986,28.447 41.986,26.043 43.231,24.798 C8_U_B.1@43.256,24.798 ; v2@43.256,26.068 C8_U_B.1@43.256,24.798 ; v2@44.907,26.068 C6_U_B.1@44.907,24.798 ; C7_U_B.1@46.558,24.798 C6_U_B.1@44.907,24.798 ; v2@59.03,17.729 59.046,17.712 60.316,17.712 C12_U_C.2@60.35,17.747 60.377,17.72 62.122,17.72 IC2_U_C.5@62.148,17.694 ; IC1_U_C.12@65.303,28.397 65.303,25.993 66.548,24.748 C8_U_C.1@66.573,24.748 ; v2@66.573,26.018 C8_U_C.1@66.573,24.748 ; v2@68.224,26.018 C6_U_C.1@68.224,24.748 ; C7_U_C.1@69.875,24.748 C6_U_C.1@68.224,24.748 ; v2@75.371,17.982 C21.2@76.641,17.982 ; v2(82.88,24.359) 82.893,24.346 82.893,23.093 R8.2@82.889,23.088 ; C8_U_A.1@20.396,24.748 C6_U_A.1@22.047,24.748 ; C8_U_B.1@43.256,24.798 C6_U_B.1@44.907,24.798 ; C8_U_C.1@66.573,24.748 C6_U_C.1@68.224,24.748
  other v2: 83.083,10.389 83.083,11.633 83.109,12.776 12.827,17.678 59.004,17.678 35.687,17.729 75.329,17.948 20.362,26.06 22.013,26.06 66.539,26.06 68.19,26.06 43.222,26.111 44.873,26.111
_U_A_N: L2_U_A.2 R5_U_A.1 | length 2.4
  Top Layer w0.22: R5_U_A.1@16.46,44.731 16.798,45.069 16.839,45.069 16.988,45.217 16.988,46.481 16.7,46.768 L2_U_A.2@16.675,46.768
_U_A_P: L1_U_A.2 R2_U_A.1 | length 2.6
  Top Layer w0.22: L1_U_A.2@17.602,46.613 L1_U_A.2@17.758,46.768 17.733,46.768 17.445,46.481 17.445,45.217 17.594,45.069 17.635,45.069 R2_U_A.1@17.973,44.731
_U_B_N: L2_U_B.2 R5_U_B.1 | length 2.4
  Top Layer w0.22: R5_U_B.1@39.32,44.781 39.658,45.119 39.699,45.119 39.848,45.268 39.848,46.531 39.56,46.819 L2_U_B.2@39.535,46.819
_U_B_P: L1_U_B.2 R2_U_B.1 | length 2.6
  Top Layer w0.22: L1_U_B.2@40.462,46.664 L1_U_B.2@40.618,46.819 40.593,46.819 40.305,46.531 40.305,45.268 40.454,45.119 40.495,45.119 R2_U_B.1@40.833,44.781
_U_C_N: L2_U_C.2 R5_U_C.1 | length 2.4
  Top Layer w0.22: R5_U_C.1@62.637,44.731 62.975,45.069 63.016,45.069 63.165,45.217 63.165,46.481 62.878,46.768 L2_U_C.2@62.853,46.768
_U_C_P: L1_U_C.2 R2_U_C.1 | length 2.6
  Top Layer w0.22: L1_U_C.2@63.779,46.613 L1_U_C.2@63.935,46.768 63.91,46.768 63.622,46.481 63.622,45.217 63.771,45.069 63.813,45.069 R2_U_C.1@64.151,44.731
GND: C4_U_A.2 C4_U_B.2 C4_U_C.2 C6_U_A.2 C6_U_B.2 C6_U_C.2 C7_U_A.2 C7_U_B.2 C7_U_C.2 C8_U_A.2 C8_U_B.2 C8_U_C.2 C12_U_A.1 C12_U_B.1 C12_U_C.1 C14_U_A.1 C14_U_B.1 C14_U_C.1 C15.2 C16.2 C17.1 C18.2 C19.2 C20.1 C21.1 C22.2 IC1_U_A.9 IC1_U_A.15 IC1_U_B.9 IC1_U_B.15 IC1_U_C.9 IC1_U_C.15 IC2_U_A.2 IC2_U_B.2 IC2_U_C.2 IC3.2 IC4.5 IC4.8 IC4.11 J2_U_A.2 J2_U_B.2 J2_U_C.2 J3.2 R9.1 R10.2 | length 32.6
  Top Layer w0.254: C18.2@81.314,12.675 C18.2@81.752,13.113 ; v2(81.534,6.248) IC4.8@83.034,6.248
  Top Layer w0.381: v2@12.895,19.295 C12_U_A.1@14.165,19.295 ; C14_U_A.1@20.532,14.461 v2@21.802,14.461 ; IC1_U_A.15@22.936,28.397 22.936,27.026 23.571,26.391 24.015,26.391 24.841,25.564 24.841,23.089 ; v2@35.755,19.346 C12_U_B.1@37.025,19.346 ; C14_U_B.1@43.392,14.512 v2@44.662,14.512 ; IC1_U_B.15@45.796,28.447 45.796,27.076 46.431,26.441 46.875,26.441 47.701,25.615 47.701,23.139 ; v2@59.072,19.295 C12_U_C.1@60.342,19.295 ; C14_U_C.1@66.709,14.461 v2@67.979,14.461 ; IC1_U_C.15@69.113,28.397 69.113,27.026 69.748,26.391 70.192,26.391 71.018,25.564 71.018,23.089 ; v2@75.294,19.6 C21.1@76.564,19.6 ; v2@78.012,14.817 C17.1@78.012,16.087 ; R9.1@84.675,18.145 v2@85.945,18.145
  other v1: 10.389,1.557 11.389,1.557 12.389,1.557 13.389,1.557 14.389,1.557 15.389,1.557 16.389,1.557 17.389,1.557 18.389,1.557 19.389,1.557 20.389,1.557 21.389,1.557 22.389,1.557 23.389,1.557 24.389,1.557 25.389,1.557 26.389,1.557 27.389,1.557 28.389,1.557 29.389,1.557 30.389,1.557 31.389,1.557 32.389,1.557 33.389,1.557 34.389,1.557 35.389,1.557 36.389,1.557 37.389,1.557 38.389,1.557 39.389,1.557 40.389,1.557 41.389,1.557 42.389,1.557 43.389,1.557 44.389,1.557 45.389,1.557 46.389,1.557 47.389,1.557 48.389,1.557 49.389,1.557 50.389,1.557 51.389,1.557 52.389,1.557 53.389,1.557 54.389,1.557 55.389,1.557 56.389,1.557 57.389,1.557 58.389,1.557 59.389,1.557 60.389,1.557 61.389,1.557 62.389,1.557 63.389,1.557 64.389,1.557 65.389,1.557 66.389,1.557 67.389,1.557 68.389,1.557 69.389,1.557 70.389,1.557 71.389,1.557 72.389,1.557 73.389,1.557 74.389,1.557 10.889,2.557 21.889,2.557 22.889,2.557 23.889,2.557 24.889,2.557 25.889,2.557 26.889,2.557 27.889,2.557 28.889,2.557 29.889,2.557 30.889,2.557 31.889,2.557 32.889,2.557 33.889,2.557 34.889,2.557 35.889,2.557 44.889,2.557 45.889,2.557 46.889,2.557 47.889,2.557 48.889,2.557 49.889,2.557 50.889,2.557 51.889,2.557 52.889,2.557 53.889,2.557 54.889,2.557 55.889,2.557 56.889,2.557 57.889,2.557 58.889,2.557 67.889,2.557 68.889,2.557 69.889,2.557 70.889,2.557 71.889,2.557 72.889,2.557 73.889,2.557 10.389,3.557 85.389,3.557 86.389,3.557 87.389,3.557 88.389,3.557 89.389,3.557 10.889,4.557 10.389,5.557 91.389,5.557 10.889,6.557 90.889,6.557 91.889,6.557 94.889,6.557 10.389,7.557 91.389,7.557 92.389,7.557 95.389,7.557 10.889,8.557 90.889,8.557 91.889,8.557 94.889,8.557 10.389,9.557 91.389,9.557 92.389,9.557 95.389,9.557 10.889,10.557 90.889,10.557 91.889,10.557 94.889,10.557 10.389,11.557 91.389,11.557 92.389,11.557 95.389,11.557 10.889,12.557 90.889,12.557 91.889,12.557 94.889,12.557 10.389,13.557 91.389,13.557 92.389,13.557 95.389,13.557 10.889,14.557 90.889,14.557 91.889,14.557 94.889,14.557 10.389,15.557 91.389,15.557 92.389,15.557 95.389,15.557 10.889,16.557 90.889,16.557 91.889,16.557 94.889,16.557 91.389,17.557 92.389,17.557 95.389,17.557 90.889,18.557 91.889,18.557 94.889,18.557 10.389,19.557 91.389,19.557 92.389,19.557 95.389,19.557 10.889,20.557 90.889,20.557 10.389,21.557 91.389,21.557 10.889,22.557 90.889,22.557 10.389,23.557 91.389,23.557 92.389,23.557 93.389,23.557 94.389,23.557 95.389,23.557 10.889,24.557 90.889,24.557 91.889,24.557 92.889,24.557 93.889,24.557 94.889,24.557 10.389,25.557 91.389,25.557 92.389,25.557 93.389,25.557 94.389,25.557 95.389,25.557 10.889,26.557 90.889,26.557 91.889,26.557 92.889,26.557 93.889,26.557 94.889,26.557 10.389,27.557 91.389,27.557 95.389,27.557 10.889,28.557 90.889,28.557 10.389,29.557 11.389,29.557 90.389,29.557 91.389,29.557 10.889,30.557 11.889,30.557 12.889,30.557 13.889,30.557 14.889,30.557 15.889,30.557 16.889,30.557 17.889,30.557 18.889,30.557 19.889,30.557 20.889,30.557 21.889,30.557 22.889,30.557 24.889,30.557 25.889,30.557 26.889,30.557 27.889,30.557 28.889,30.557 29.889,30.557 30.889,30.557 31.889,30.557 32.889,30.557 33.889,30.557 34.889,30.557 35.889,30.557 36.889,30.557 37.889,30.557 38.889,30.557 39.889,30.557 40.889,30.557 41.889,30.557 42.889,30.557 43.889,30.557 44.889,30.557 45.889,30.557 47.889,30.557 48.889,30.557 49.889,30.557 50.889,30.557 51.889,30.557 52.889,30.557 53.889,30.557 54.889,30.557 55.889,30.557 56.889,30.557 57.889,30.557 58.889,30.557 59.889,30.557 60.889,30.557 61.889,30.557 62.889,30.557 63.889,30.557 64.889,30.557 65.889,30.557 67.889,30.557 68.889,30.557 69.889,30.557 70.889,30.557 71.889,30.557 72.889,30.557 73.889,30.557 74.889,30.557 75.889,30.557 76.889,30.557 77.889,30.557 78.889,30.557 79.889,30.557 80.889,30.557 81.889,30.557 82.889,30.557 83.889,30.557 84.889,30.557 85.889,30.557 86.889,30.557 87.889,30.557 88.889,30.557 89.889,30.557 90.889,30.557 91.889,30.557
  other v2: 17.374,4.801 63.551,4.801 40.234,4.851 16.408,5.055 18.288,5.055 62.586,5.055 64.465,5.055 39.268,5.105 41.148,5.105 81.077,5.537 81.991,5.537 15.672,5.944 19.025,5.944 61.849,5.944 65.202,5.944 38.532,5.994 41.885,5.994 81.077,6.96 81.991,6.96 15.57,7.29 19.126,7.29 61.747,7.29 65.303,7.29 38.43,7.341 41.986,7.341 16.231,8.179 18.466,8.179 62.408,8.179 64.643,8.179 39.091,8.23 41.326,8.23 16.561,9.373 18.263,9.373 62.738,9.373 64.44,9.373 39.421,9.423 41.123,9.423 82.042,10.389 16.535,10.82 18.415,10.82 62.713,10.82 64.592,10.82 39.395,10.871 41.275,10.871 82.067,11.633 82.042,12.776 21.844,14.495 68.021,14.495 44.704,14.546 15.265,14.605 61.443,14.605 38.125,14.656 78.047,14.774 11.43,17.882 57.607,17.882 34.29,17.932 85.987,18.179 19.228,18.618 65.405,18.618 42.088,18.669 12.852,19.261 59.03,19.261 35.712,19.312 75.252,19.566 19.456,21.768 22.073,21.768 25.222,21.768 65.634,21.768 68.25,21.768 71.399,21.768 42.316,21.819 44.933,21.819 48.082,21.819 18.263,24.689 64.44,24.689 41.123,24.74 15.85,24.917 62.027,24.917 38.71,24.968 23.254,26.708 69.431,26.708 18.237,26.721 64.414,26.721 46.114,26.759 15.316,26.772 41.097,26.772 61.493,26.772 38.176,26.822 14.275,28.448 60.452,28.448 37.135,28.499
  other v3: 81.89,14.351
HGND_U_A: C1_U_A.2 C2_U_A.2 C3_U_A.2 C9_U_A.2 C10_U_A.2 IC1_U_A.2 IC1_U_A.8 L3_U_A.2 | length 5.1
  Top Layer w0.254: L3_U_A.2@14.275,46.768 14.3,46.768 14.473,46.595 L3_U_A.2@14.473,46.57
  Top Layer w0.381: 22.809,42.647 22.936,42.52 IC1_U_A.2@22.936,37.847
  other v3: 14.199,42.748 14.199,43.544 24.477,43.866 25.273,43.866 26.069,43.866 26.865,43.866 19.905,43.942 20.701,43.942 21.497,43.942 22.293,43.942 14.199,44.34 19.931,45.034 20.726,45.034 21.522,45.034 22.318,45.034 24.477,45.034 25.273,45.034 26.069,45.034 26.865,45.034 14.199,45.136
HGND_U_B: C1_U_B.2 C2_U_B.2 C3_U_B.2 C9_U_B.2 C10_U_B.2 IC1_U_B.2 IC1_U_B.8 L3_U_B.2 | length 5.1
  Top Layer w0.254: L3_U_B.2@37.135,46.819 37.16,46.819 37.333,46.646 L3_U_B.2@37.333,46.621
  Top Layer w0.381: 45.669,42.697 45.796,42.57 IC1_U_B.2@45.796,37.897
  other v3: 37.059,42.799 37.059,43.595 47.337,43.917 48.133,43.917 48.929,43.917 49.725,43.917 42.765,43.993 43.561,43.993 44.357,43.993 45.153,43.993 37.059,44.391 42.791,45.085 43.586,45.085 44.382,45.085 45.178,45.085 47.337,45.085 48.133,45.085 48.929,45.085 49.725,45.085 37.059,45.187
HGND_U_C: C1_U_C.2 C2_U_C.2 C3_U_C.2 C9_U_C.2 C10_U_C.2 IC1_U_C.2 IC1_U_C.8 L3_U_C.2 | length 5.1
  Top Layer w0.254: L3_U_C.2@60.452,46.768 60.477,46.768 60.65,46.595 L3_U_C.2@60.65,46.57
  Top Layer w0.381: 68.986,42.647 69.113,42.52 IC1_U_C.2@69.113,37.847
  other v3: 60.376,42.748 60.376,43.544 70.654,43.866 71.45,43.866 72.246,43.866 73.042,43.866 66.082,43.942 66.878,43.942 67.674,43.942 68.47,43.942 60.376,44.34 66.108,45.034 66.904,45.034 67.699,45.034 68.495,45.034 70.654,45.034 71.45,45.034 72.246,45.034 73.042,45.034 60.376,45.136
In_ic_U_A_N: C11_U_A.2 IC1_U_A.7 R5_U_A.2 | length 6.3
  Top Layer w0.22: R5_U_A.2@16.46,43.191 16.485,43.191 16.839,42.836 16.839,42.811 17.001,42.649 17.001,41.995 16.451,41.446 16.451,41.396 16.806,41.041 16.88,41.041 17.009,40.912 17.009,38.841 16.88,38.711 16.801,38.711 16.586,38.497 IC1_U_A.7@16.586,37.847
In_ic_U_A_P: C11_U_A.1 IC1_U_A.6 R2_U_A.2 | length 6.3
  Top Layer w0.22: IC1_U_A.6@17.856,37.847 17.856,38.497 17.641,38.711 17.562,38.711 17.433,38.841 17.433,40.912 17.562,41.041 17.636,41.041 17.991,41.396 17.991,41.446 17.424,42.012 17.424,42.642 17.594,42.811 17.594,42.836 17.948,43.191 R2_U_A.2@17.973,43.191
In_ic_U_B_N: C11_U_B.2 IC1_U_B.7 R5_U_B.2 | length 6.3
  Top Layer w0.22: R5_U_B.2@39.32,43.241 39.345,43.241 39.699,42.887 39.699,42.862 39.861,42.7 39.861,42.046 39.311,41.496 39.311,41.446 39.666,41.092 39.74,41.092 39.869,40.962 39.869,38.891 39.74,38.762 39.661,38.762 39.446,38.547 IC1_U_B.7@39.446,37.897
In_ic_U_B_P: C11_U_B.1 IC1_U_B.6 R2_U_B.2 | length 6.3
  Top Layer w0.22: IC1_U_B.6@40.716,37.897 40.716,38.547 40.501,38.762 40.422,38.762 40.293,38.891 40.293,40.962 40.422,41.092 40.496,41.092 40.851,41.446 40.851,41.496 40.284,42.063 40.284,42.692 40.454,42.862 40.454,42.887 40.808,43.241 R2_U_B.2@40.833,43.241